# Altium PCB MDBU004A.PcbDoc (part 1 of 2)
Units mil, origin at the board's own origin, x right, y up, seen from the top; angles counter-clockwise.
Board outline 2000 x 3000 mil, 2 copper layers (Top Layer, Bottom Layer), stack 63.4 mil thick; 60 components, 60 nets, 274 pads, 201 vias.
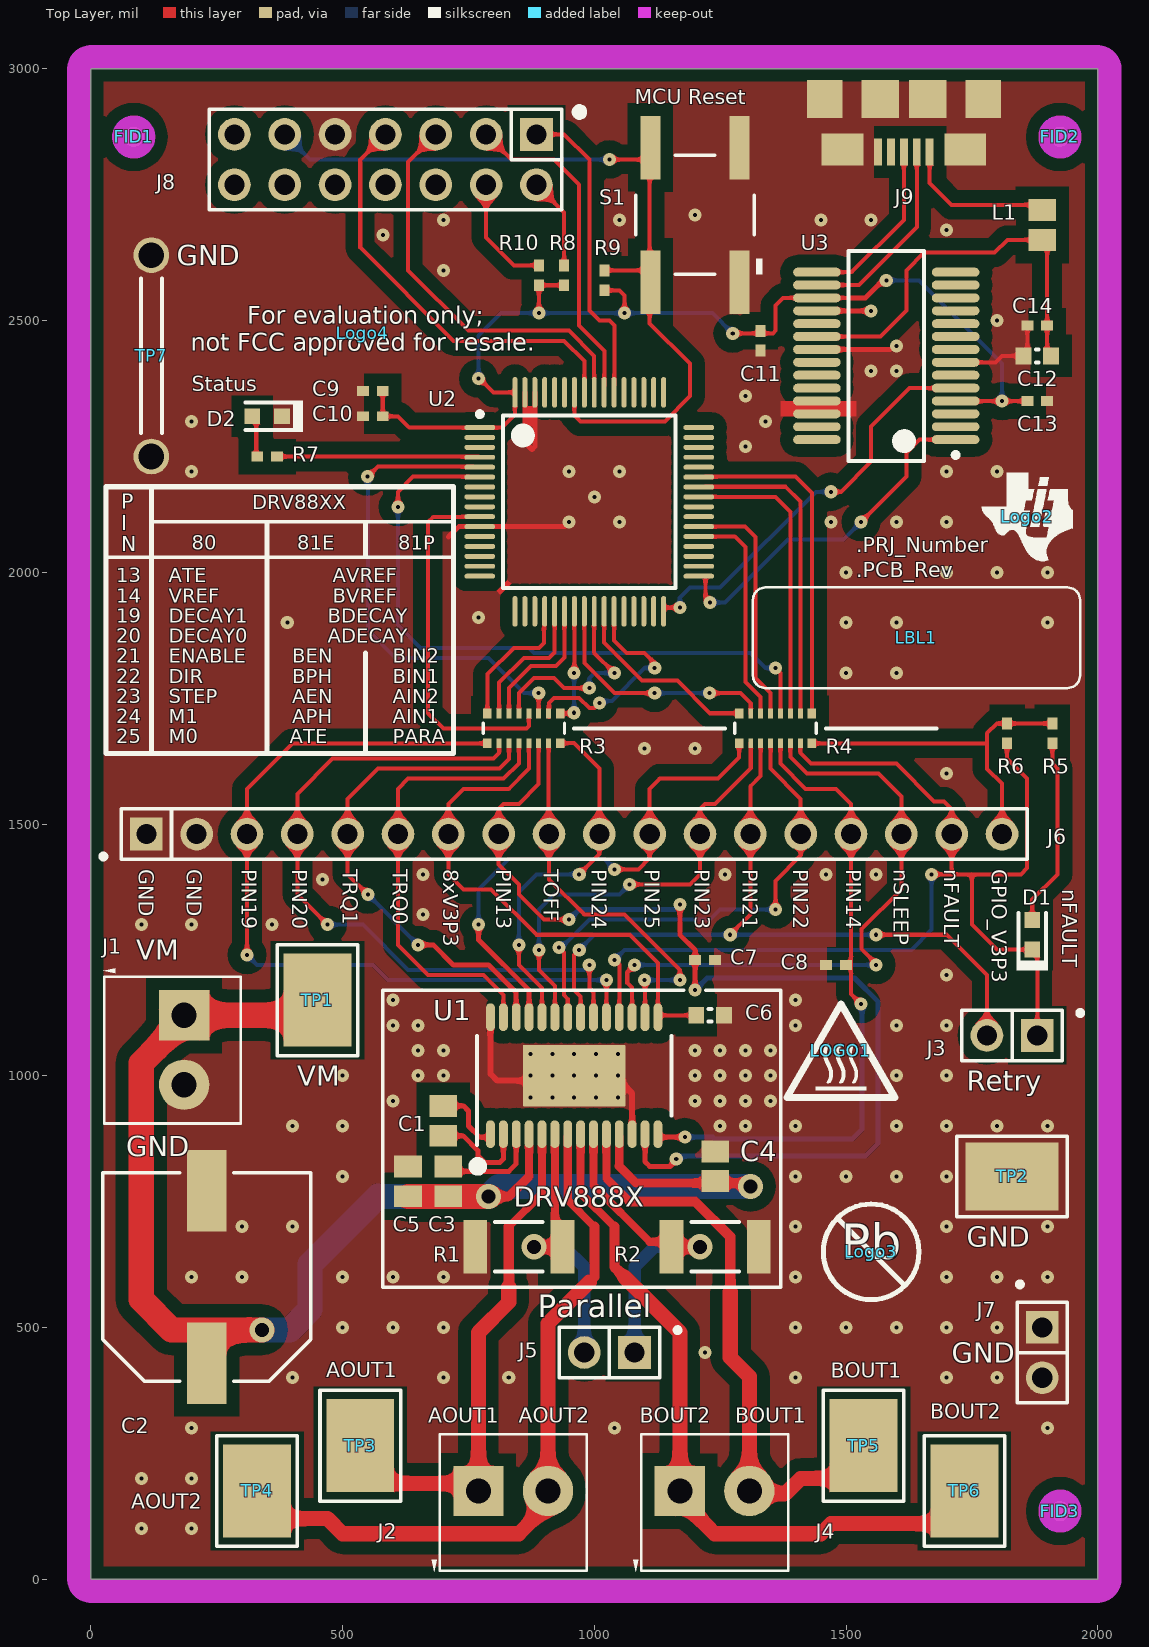
[diagram p0: Top Layer view]
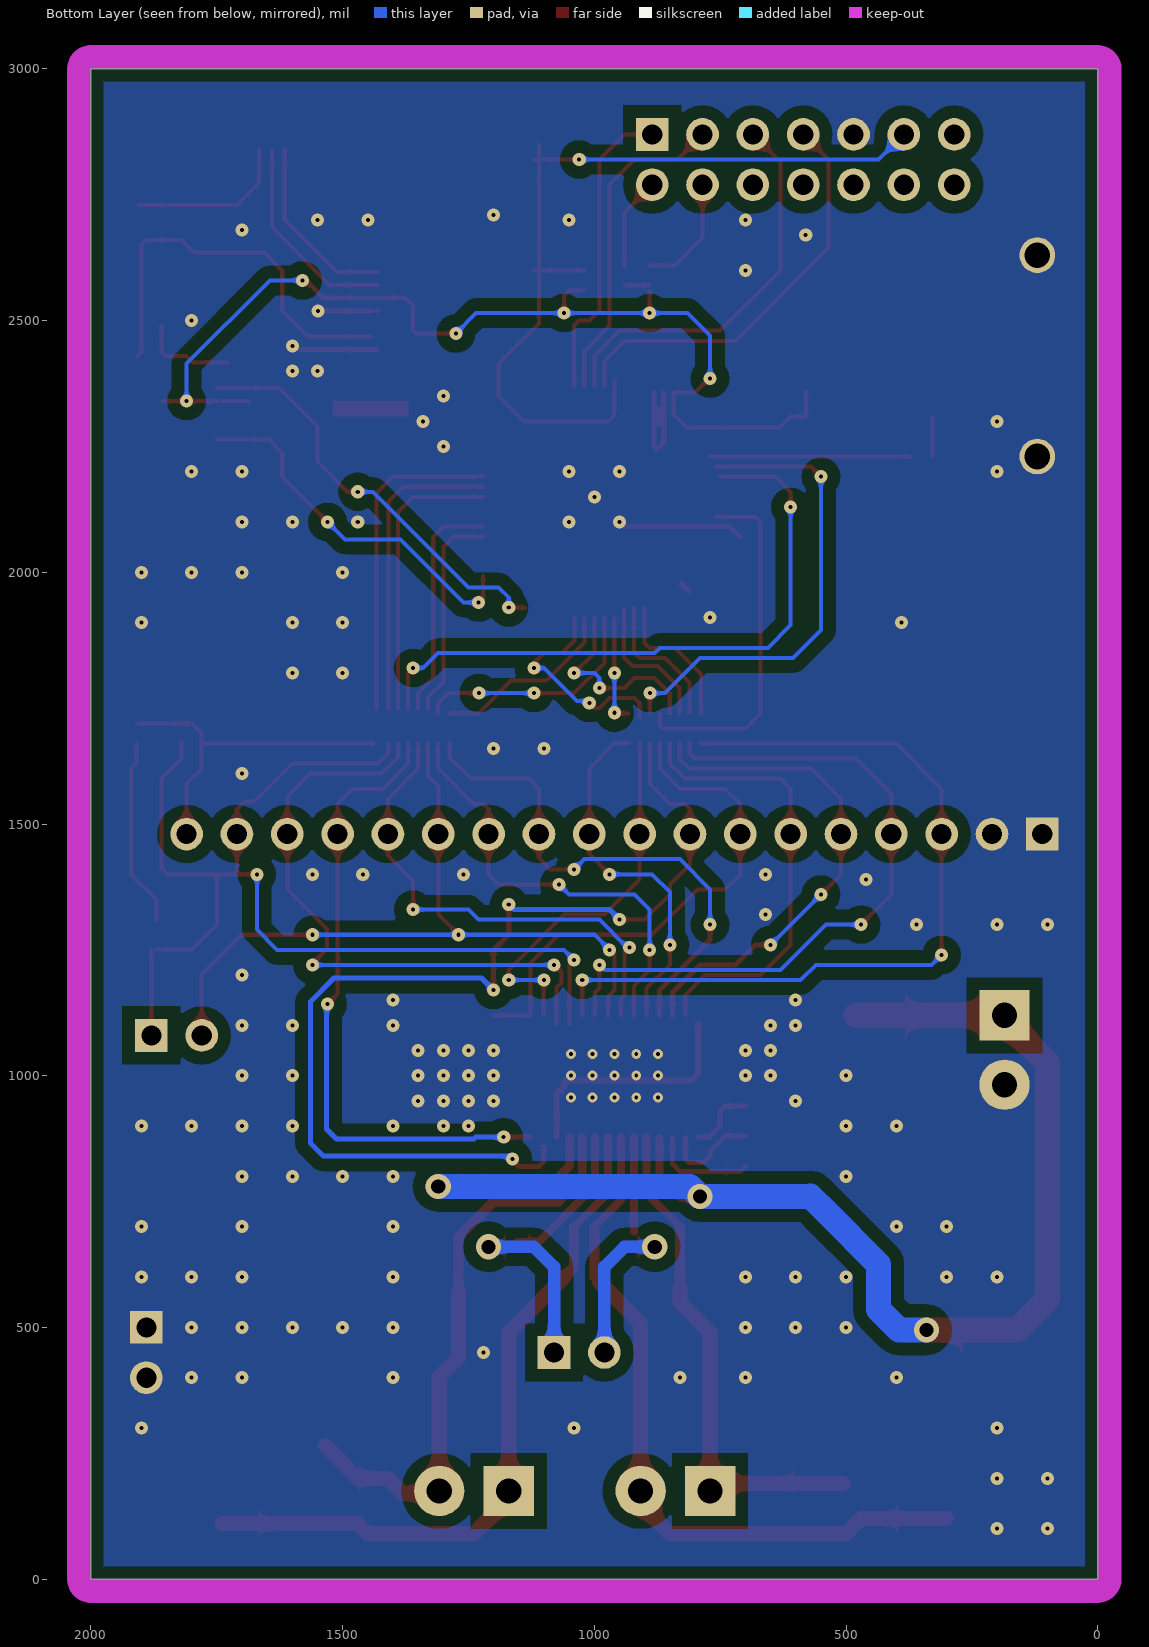
[diagram p1: Bottom Layer view, seen from below]

## Layer stack, top to bottom
Top Solder: solder mask 0.4, Solder Resist, Dk 3.5
Top Layer: signal copper 2.1
Dielectric1: core 59.2, FR-4, Dk 4.8
Bottom Layer: signal copper 2.1
Bottom Solder: solder mask 0.4, Solder Resist, Dk 3.5

## Board outline
0,0 0,3000 2000,3000 2000,0

## Design rules (kind name [scope] priority, off if disabled: settings)
AcuteAngle [All] p1: minimum=4.50000000000000E+0001 checktracksonly=FALSE
AssemblyTestPointUsage [All] p1: valid=2
Clearance Clearance_Keepouts [((IsTrack Or IsArc) And Not InPoly) And IsFree and IsKeepOut vs ((IsTrack Or IsArc) And Not InPoly) And IsFree and IsKeepOut] p1: gap=0
Clearance Clearance_BoardEdge_MountingHoles [OnCopper and InComponentClass('Mounting Holes') vs IsKeepOut] p2: gap=40
Clearance Clearance_BoardEdge_Poly [OnCopper and InPoly vs IsKeepOut] p3: gap=25
Clearance Clearance_BoardEdge [OnCopper and Not InComponentClass('Logo') and not InComponentClass('FiducialMark') and not InRegion(1000,500,4000,800) and Not IsKeepout vs IsKeepOut] p4: gap=20
Clearance Clearance_Poly [InPolygon] p5: gap=25
Clearance [All] p6: gap=7.87
ComponentClearance ComponentClearance_MountingHoles_FiducialMarks [InComponentClass('Mounting Holes') vs InComponentClass('FiducialMark')] p1: gap=50 collisioncheckmode=3 verticalgap=10 showdistances=FALSE
ComponentClearance ComponentClearance_Shunt [InComponentClass('Header') vs InComponentClass('Shunt')] p2: gap=0 collisioncheckmode=3 verticalgap=0 showdistances=FALSE
ComponentClearance ComponentClearance_Logo [InComponentClass('Logo')] p3: gap=50 collisioncheckmode=3 verticalgap=10 showdistances=FALSE
ComponentClearance ComponentClearance_ScrewToNut [(HasFootprint('NY PMS 440 0025 PH')) vs (HasFootprint('Keystone_1902C'))] p4: gap=5 collisioncheckmode=3 verticalgap=10 showdistances=FALSE
ComponentClearance ComponentClearance_MountingHoles [InComponentClass('Mounting Holes')] p5: gap=250 collisioncheckmode=3 verticalgap=100000 showdistances=FALSE
ComponentClearance ComponentClearance_SmallPassives [HasFootprint('0201*') or HasFootprint('0402*') or HasFootprint('0508') or HasFootprint('0603*') or HasFootprint('0612') or HasFootprint('0805*') or HasFootprint('0815*') or HasFootprint('0830*') or HasFootprint('1206*') or HasFootprint('1210*') or HasFootprint('1808*') or HasFootprint('1812*') or HasFootprint('1825*') or HasFootprint('2010*') or HasFootprint('2220*') or HasFootprint('2225*') or HasFootprint('2512*') or HasFootprint('2728*') or HasFootprint('3518*') vs HasFootprint('0201*') or HasFootprint('0402*') or HasFootprint('0508') or HasFootprint('0603*') or HasFootprint('0612') or HasFootprint('0805*') or HasFootprint('0815*') or HasFootprint('0830*') or HasFootprint('1206*') or HasFootprint('1210*') or HasFootprint('1808*') or HasFootprint('1812*') or HasFootprint('1825*') or HasFootprint('2010*') or HasFootprint('2220*') or HasFootprint('2225*') or HasFootprint('2512*') or HasFootprint('2728*') or HasFootprint('3518*')] p6: gap=20 collisioncheckmode=3 verticalgap=10 showdistances=FALSE
ComponentClearance ComponentClearance_THtoSMT [IsThruComponent vs IsSMTComponent] p7: gap=100 collisioncheckmode=3 verticalgap=30 showdistances=FALSE
ComponentClearance ComponentClearance_THtoTH [IsThruComponent vs IsThruComponent] p8: gap=118.11 collisioncheckmode=3 verticalgap=30 showdistances=FALSE
ComponentClearance [All] p9: gap=40 collisioncheckmode=3 verticalgap=10 showdistances=FALSE
DiffPairsRouting [All] p1: maxlimit=100 minlimit=10 mostfreqgap=10 toplayer_minwidth=15 toplayer_maxwidth=15 toplayer_prefwidth=15 bottomlayer_minwidth=15 bottomlayer_maxwidth=15 bottomlayer_prefwidth=15 maxuncoupledlength=1000
FabricationTestPointUsage TestPointUsage [All] p1: valid=2 allowmultiple=FALSE
FabricationTestpoint Testpoint [All] p1: side=3 testpointundercomponent=TRUE minsize=40 maxsize=100 preferedsize=60 minholesize=0 maxholesize=40 preferedholesize=32 testpointgrid=1 allowsidetop=TRUE allowsidebottom=TRUE usegrid=TRUE gridtolerance=0.01
FanoutControl Fanout_LCC [IsLCC] p1: bgadir=Out bgaviamode=Centered fanoutstyle=Auto fanoutdirection=Alternating viagrid=1 // Fanout_LCC (Default Rule)
FanoutControl Fanout_BGA [IsBGA] p2: bgadir=Out bgaviamode=Centered fanoutstyle=Auto fanoutdirection=Alternating viagrid=1 // Fanout_BGA (Default Rule)
FanoutControl Fanout_Default [All] p4: bgadir=Out bgaviamode=Centered fanoutstyle=Auto fanoutdirection=Alternating viagrid=1 // Fanout_Default (Default Rule)
FanoutControl Fanout_Small [(CompPinCount < 5)] p5: bgadir=Out bgaviamode=Centered fanoutstyle=Auto fanoutdirection=OutThenIn viagrid=1 // Fanout_Small (Default Rule)
HoleSize [All] p1: absolutevalues=TRUE maxlimit=251 minlimit=7.87 maxpercent=80.000 minpercent=20.000
MinimumAnnularRing MinimumAnnularRing_ThermalPadVias [IsVia and InAnyComponent] p1: minimumring=3.94
MinimumAnnularRing [All] p2: minimumring=5
MinimumSolderMaskSliver MinimumSolderMaskSliver_Logo [InComponentClass('Logo') vs InComponentClass('Logo')] p1: minsoldermaskwidth=0.7
MinimumSolderMaskSliver [All] p2: minsoldermaskwidth=3.94
PlaneConnect [All] p1: planeconnectstyle=Relief reliefexpansion=10 reliefentries=4 reliefconductorwidth=10 reliefairgap=10
PolygonConnect PolygonConnect_2 [All vs IsNamedPolygon('Top Layer-GND')] p1: connectstyle=Direct reliefconductorwidth=10 reliefentries=4 polygonreliefangle="90 Angle" airgapwidth=10
PolygonConnect PolygonConnect_1 [All vs IsNamedPolygon('Bottom Layer-GND')] p2: connectstyle=Direct reliefconductorwidth=10 reliefentries=4 polygonreliefangle="90 Angle" airgapwidth=10
PolygonConnect [All] p3: connectstyle=Relief reliefconductorwidth=10 reliefentries=4 polygonreliefangle="90 Angle" airgapwidth=10
RoutingVias ThermalPadVias [IsVia and InAnyComponent] p1: holewidth=7.87 width=19.68 viastyle="Through Hole" minholewidth=7.87 minwidth=15.75 maxholewidth=12.99 maxwidth=23.62
RoutingVias [All] p2: holewidth=16 width=34 viastyle="Through Hole" minholewidth=7.87 minwidth=26 maxholewidth=40 maxwidth=65
SilkToBoardRegionClearance [Not ((IsComment or IsDesignator) And (Hide <> 'False')) and not InRegion(1000,500,4000,800)] p1 off:
SilkToSilkClearance SilkToSilkClearance_Pb-FreeLogo [(HasFootprint('Pb-Free_Overlay_Medium') OR HasFootprint('Pb-Free_Overlay_Small')) vs (HasFootprint('Pb-Free_Overlay_Medium') OR HasFootprint('Pb-Free_Overlay_Small'))] p1: silktosilkclearance=0
SilkToSilkClearance [All] p2: silktosilkclearance=3
SilkToSolderMaskClearance "Silk to Solder Mask Opening" [All] p1: minsilkscreentomaskgap=3 clearancetoexposedcopper=FALSE
SolderMaskExpansion [All] p1: expansion=1.97
UnpouredPolygon [All] p1: allowunpoured=FALSE
Width [All] p1: maxlimit=100 minlimit=6 preferedwidth=10 checkconnectedcopper=TRUE
14 further rules are at their usual default settings.

## Classes and differential pairs
component class Header: J3 J5 J6 J7 J8
component class MDBU004A_DRV888x: C1 C2 C3 C4 C5 C6 C7 C8 D1 J1 J2 J3 J4 J5 J6 J7 R1 R2 R3 R4 R5 R6 TP1 TP2 TP3 TP4 TP5 TP6 TP7 U1
component class MDBU004A_DRV888x_MSP430F2617: C9 C10 C11 C12 C13 C14 D2 J8 J9 L1 R7 R8 R9 R10 S1 U2 U3
component class Logo: Logo2
component class MDBU004A_Hardware: FID1 FID2 FID3 LBL1 LOGO1 Logo2 Logo3 Logo4 ZZ1 ZZ2 ZZ3 ZZ4 ZZ5
component class FiducialMark: FID1 FID2 FID3
component class AssemblyNote: ZZ1 ZZ2 ZZ3 ZZ4 ZZ5
component class Label: LBL1

## Components (designator, comment, footprint, x,y, rotation, side; value= is the part's Value field where it differs from the comment)
C1 "C0805C104K1RACTU" 0805L 700,910 r270 top
C2 "EEE-FK1J101P" SM_RADIAL_G 230,600 r90 top
C3 "C2012X7R1E474K" 0805L 710,790 r270 top
C4 "C0805C104K1RACTU" 0805L 1240,820 r270 top
C5 "C0805C104K1RACTU" 0805L 630,790 r270 top
C6 "C0603C474K9RACTU" 0603L 1230,1120 r0 top
C7 "GRM155R61A104KA01D" 0402L 1220,1230 r0 top
C8 "GRM155R61A104KA01D" 0402L 1480,1220 r180 top
C9 "GRM155R61A104KA01D" 0402L 560,2360 r180 top
C10 "GRM155R61A104KA01D" 0402L 560,2310 r180 top
C11 "GRM155R61A104KA01D" 0402L 1330,2460 r270 top
C12 "CGB3B1X5R1A475K055AC" 0603L 1880,2430 r180 top
C13 "GRM155R61A105KE15D" 0402L 1880,2340 r0 top
C14 "GRM155R61A104KA01D" 0402L 1880,2490 r180 top
D1 "LTST-C190CKT" LED_LTST-C190_Red 1870,1280 r270 top
D2 "LTST-C190GKT" LED_LTST-C190 350,2310 r0 top
FID1 "Fiducial" Fiducial10-20 85,2865 r90 top
FID2 "Fiducial" Fiducial10-20 1925,2865 r90 top
FID3 "Fiducial" Fiducial10-20 1925,135 r90 top
J1 "ED555/2DS" TERM_BLK_ED555-2DS 185,1120 r270 top
J2 "ED555/2DS" TERM_BLK_ED555-2DS 770,175 r0 top
J3 "90120-0122" CONN_90120-0122 1830,1080 r180 top
J4 "ED555/2DS" TERM_BLK_ED555-2DS 1170,175 r0 top
J5 "90120-0122" CONN_90120-0122 1030,450 r180 top
J6 "TSW-118-07-G-S" TSW-118-07-G-S 960,1480 r0 top
J7 "90120-0122" CONN_90120-0122 1890,450 r270 top
J8 "PEC07DAAN" CONN_PEC07DAAN 585,2820 r180 top
J9 "ZX62-B-5PA(11)" CONN_USB_micro_ZX62-B-5PA 1615,2835 r180 top
L1 "MMZ2012R300A" 0805L 1890,2690 r90 top
LBL1 "Size: 0.65\" x 0.20 \"" Label_650x200 1640,1870 r0 top
LOGO1 "CAUTION HOT SURFACE" IEC_HotSurface_Small 1490,1050 r0 top
Logo2 "Texas Instruments" TI_Symbol_Overlay_Small 1860,2110 r0 top
Logo3 "Pb-Free Symbol" Pb-Free_Overlay_Medium 1550,650 r0 top
Logo4 "FCC disclaimer" FCC_disclaimer_stacked 540,2475 r0 top
R1 "CSRN2010FKR250" 2010L 850,660 r0 top
R2 "CSRN2010FKR250" 2010L 1240,660 r180 top
R3 "EXB-2HV330JV" RESCAXS_EXB-2HV 860,1690 r0 top
R4 "EXB-2HV330JV" RESCAXS_EXB-2HV 1360,1690 r0 top
R5 "CRCW0402510RJNED" 0402L 1910,1680 r90 top
R6 "CRCW04024K99FKED" 0402L 1820,1680 r90 top
R7 "CRCW0402330RJNED" 0402L 350,2230 r0 top
R8 "ERJ-2GE0R00X" 0402L 940,2590 r90 top
R9 "CRCW04023K32FKED" 0402L 1020,2580 r270 top
R10 "ERJ-2GE0R00X" 0402L 890,2590 r90 top
S1 "EVQP1D05M" SW_EVQxxx05M 1200,2710 r180 top
TP1 "5016" Testpoint_Keystone_Compact 450,1150 r90 top
TP2 "5016" Testpoint_Keystone_Compact 1830,800 r180 top
TP3 "5016" Testpoint_Keystone_Compact 535,265 r90 top
TP4 "5016" Testpoint_Keystone_Compact 330,175 r90 top
TP5 "5016" Testpoint_Keystone_Compact 1535,265 r90 top
TP6 "5016" Testpoint_Keystone_Compact 1735,175 r90 top
TP7 "D3082-05" Harwin_D3082-05 120,2430 r270 top
U1 "DRV8880PWPR" PWP0028C_N 960,1000 r90 top
U2 "MSP430F2617TPM" PM0064A_L 990,2140 r0 top
U3 "FT232RL" SSOP28_M 1580,2430 r180 top
ZZ1 "This Assembly Note is for PCB labels only" AssemblyNoteLabel 276,3252 r0 top
ZZ2 "These assemblies are ESD sensitive, ESD precautions shall be observed." AssemblyNote 276,3412 r0 top
ZZ3 "These assemblies must be clean and free from flux and all contaminants. Use of no clean flux is not acceptable." AssemblyNote 276,3592 r0 top
ZZ4 "These assemblies must comply with workmanship standards IPC-A-610 Class 2, unless otherwise specified." AssemblyNote 276,3772 r0 top
ZZ5 "Shorting plug TP7 shall be raised to minimum height of 250mils above PCB" AssemblyNote 276,3952 r0 top

## Footprints (in the part's own frame and the unit in brackets; to place one, negate y for a bottom-side part, rotate by r counter-clockwise, add the part's x,y. Pads: shape width x height; smd on the part's side, far side on the other; paste and mask are expansions set on the pad)
0402L [mm] "0402 from SM-752 data"
  rect 0.6x0.5 smd: 1(-0.5,0) 2(0.5,0)
  body extent -0.55,-0.3 0.55,0.3, height 0.6
0603L [mm] "0603 from SM-752 data"
  rect 0.8x0.85 smd: 1(-0.7,0) 2(0.7,0)
  silkscreen extent -0.07,-0.33 0.07,0.33, body extent -0.87,-0.47 0.87,0.47, height 0.85
0805L [mm] "0805 from SM-752 data"
  rect 1.1x1.4 smd: 1(-0.75,0) 2(0.75,0)
  body extent -1.1,-0.72 1.1,0.72, height 1.1
2010L [mm]
  rect 1.2x2.7 smd: 1(-2.2,0) 2(2.2,0)
  silkscreen extent -1.2,-1.25 1.2,1.25, body extent -2.73,-1.45 2.73,1.45, height 1.66
AssemblyNote [mil] "Assembly Note"
AssemblyNoteLabel [mil] "Assembly Note for PCB Labels"
CONN_90120-0122 [mm] "Molex"
  rect 1.65x1.65 hole 1.016 mask+0: 1(-1.27,0)
  round 1.65 hole 1.016 mask+0: 2(1.27,0)
  silkscreen extent -3.57,-1.27 2.54,1.27, body extent -2.54,-1.27 2.54,1.27, height 9.29
CONN_PEC07DAAN [mm] "SULLINS"
  rect 1.65x1.65 hole 1.016 mask+0: 1(-7.62,-1.27)
  round 1.65 hole 1.016 mask+0: 2(-7.62,1.27) 3(-5.08,-1.27) 4(-5.08,1.27) 5(-2.54,-1.27) 6(-2.54,1.27) 7(0,-1.27) 8(0,1.27) 9(2.54,-1.27) 10(2.54,1.27) 11(5.08,-1.27) 12(5.08,1.27) 13(7.62,-1.27) 14(7.62,1.27)
  silkscreen extent -9.99,-2.6 8.89,2.54, body extent -8.95,-2.6 8.95,2.6, height 11.43
CONN_USB_micro_ZX62-B-5PA [mm] "Hirose"
  rect 0.4x1.35 smd: 1(-1.3,0) 2(-0.65,0) 3(0,0) 4(0.65,0) 5(1.3,0)
  rect 1.9x1.9 smd: 6(-1.2,-2.675) 7(1.2,-2.675)
  rect 1.8x1.9 smd: 8(-4,-2.675) 9(4,-2.675)
  rect 2.1x1.6 smd: 10(-3.1,-0.125) 11(3.1,-0.125)
  body extent -3.75,-5.33 3.75,0.18, height 2.55
FCC_disclaimer_stacked [mil]
Fiducial10-20 [mm]
  round 1 smd mask+0.5: 1(0,0)
  Top Layer keep-out circle w1.178: c0,0 r0.5
Harwin_D3082-05 [mm] "Shorting Plug, 10.16mm spacing, TH"
  round 1.8 hole 1.3: 1(-5.08,0) 2(5.08,0)
  silkscreen extent -3.9,-0.53 3.9,0.53, body extent -5.6,-0.52 5.61,0.52, height 6.63
IEC_HotSurface_Small [mil]
  silkscreen extent -107,-93 107,92
Label_650x200 [mil] "Thermal Transfer Label"
  round 1 on Mech13: 0(0,0)
  silkscreen extent -325,-100 325,100, body extent -326,-101 326,101, height 1
LED_LTST-C190 [mm] "Lite-On"
  rect 0.8x0.8 smd: 1(-0.75,0) 2(0.75,0)
  silkscreen extent -1.1,-0.8 1.8,0.8, body extent -0.85,-0.45 0.85,0.45, height 0.9
LED_LTST-C190_Red [mm] "Lite-On"
  rect 0.8x0.8 smd: 1(-0.75,0) 2(0.75,0)
  silkscreen extent -1.1,-0.8 1.8,0.8, body extent -0.85,-0.45 0.85,0.45, height 0.9
Pb-Free_Overlay_Medium [mil]
  silkscreen extent -95,-95 95,95
PM0064A_L [mm] "Thin QFP, 64-Leads, Body 10x10mm, Pitch 0.5mm, IPC High Density"
  oval 1.55x0.25 smd: 1(-5.525,3.75) 2(-5.525,3.25) 3(-5.525,2.75) 4(-5.525,2.25) 5(-5.525,1.75) 6(-5.525,1.25) 7(-5.525,0.75) 8(-5.525,0.25) 9(-5.525,-0.25) 10(-5.525,-0.75) 11(-5.525,-1.25) 12(-5.525,-1.75) 13(-5.525,-2.25) 14(-5.525,-2.75) 15(-5.525,-3.25) 16(-5.525,-3.75) 33(5.525,-3.75) 34(5.525,-3.25) 35(5.525,-2.75) 36(5.525,-2.25) 37(5.525,-1.75) 38(5.525,-1.25) 39(5.525,-0.75) 40(5.525,-0.25) 41(5.525,0.25) 42(5.525,0.75) 43(5.525,1.25) 44(5.525,1.75) 45(5.525,2.25) 46(5.525,2.75) 47(5.525,3.25) 48(5.525,3.75)
  oval 0.25x1.55 smd: 17(-3.75,-5.525) 18(-3.25,-5.525) 19(-2.75,-5.525) 20(-2.25,-5.525) 21(-1.75,-5.525) 22(-1.25,-5.525) 23(-0.75,-5.525) 24(-0.25,-5.525) 25(0.25,-5.525) 26(0.75,-5.525) 27(1.25,-5.525) 28(1.75,-5.525) 29(2.25,-5.525) 30(2.75,-5.525) 31(3.25,-5.525) 32(3.75,-5.525) 49(3.75,5.525) 50(3.25,5.525) 51(2.75,5.525) 52(2.25,5.525) 53(1.75,5.525) 54(1.25,5.525) 55(0.75,5.525) 56(0.25,5.525) 57(-0.25,5.525) 58(-0.75,5.525) 59(-1.25,5.525) 60(-1.75,5.525) 61(-2.25,5.525) 62(-2.75,5.525) 63(-3.25,5.525) 64(-3.75,5.525)
  silkscreen extent -5.65,-4.35 4.35,4.55, body extent -5,-5 5,5, height 1.61
PWP0028C_N [mm] "TSOP, 28-Leads, Body 9.7x4.4mm, Pitch 0.65mm, Exposed Pad, IPC Medium Density"
  rrect100% 1.4x0.45 smd: 1(-2.95,4.225) 2(-2.95,3.575) 3(-2.95,2.925) 4(-2.95,2.275) 5(-2.95,1.625) 6(-2.95,0.975) 7(-2.95,0.325) 8(-2.95,-0.325) 9(-2.95,-0.975) 10(-2.95,-1.625) 11(-2.95,-2.275) 12(-2.95,-2.925) 13(-2.95,-3.575) 14(-2.95,-4.225) 15(2.95,-4.225) 16(2.95,-3.575) 17(2.95,-2.925) 18(2.95,-2.275) 19(2.95,-1.625) 20(2.95,-0.975) 21(2.95,-0.325) 22(2.95,0.325) 23(2.95,0.975) 24(2.95,1.625) 25(2.95,2.275) 26(2.95,2.925) 27(2.95,3.575) 28(2.95,4.225)
  rrect3% 3.1x5.18 smd: 29(0,0)
  silkscreen extent -3.5,-4.9 2,4.9, body extent -3.21,-4.85 3.21,4.85, height 0.98
RESCAXS_EXB-2HV [mm] "Panasonic Resistor Array"
  rect 0.425x0.5 smd mask+0.07: 1(-1.837,-0.75) 8(1.837,-0.75) 9(1.837,0.75) 16(-1.837,0.75)
  rect 0.25x0.5 smd mask+0.07: 2(-1.25,-0.75) 3(-0.75,-0.75) 4(-0.25,-0.75) 5(0.25,-0.75) 6(0.75,-0.75) 7(1.25,-0.75) 10(1.25,0.75) 11(0.75,0.75) 12(0.25,0.75) 13(-0.25,0.75) 14(-0.75,0.75) 15(-1.25,0.75)
  silkscreen extent -2.05,-0.25 2.05,0.25, body extent -1.95,-0.8 1.95,0.8, height 0.55
SM_RADIAL_G [mm] "10 x 10.2mm:  Panasonic G"
  rect 4.1x2 smd: 1(-4.35,0) 2(4.35,0)
  silkscreen extent -5.25,-5.25 5.25,5.25, body extent -5.26,-5.26 5.26,5.26, height 10.5
SSOP28_M [mm] "SOP, 28-Leads, Body 10.2x5.3mm, Pitch 0.65mm, IPC Low Density"
  oval 2.4x0.45 smd: 1(-3.5,4.225) 2(-3.5,3.575) 3(-3.5,2.925) 4(-3.5,2.275) 5(-3.5,1.625) 6(-3.5,0.975) 7(-3.5,0.325) 8(-3.5,-0.325) 9(-3.5,-0.975) 10(-3.5,-1.625) 11(-3.5,-2.275) 12(-3.5,-2.925) 13(-3.5,-3.575) 14(-3.5,-4.225) 15(3.5,-4.225) 16(3.5,-3.575) 17(3.5,-2.925) 18(3.5,-2.275) 19(3.5,-1.625) 20(3.5,-0.975) 21(3.5,-0.325) 22(3.5,0.325) 23(3.5,0.975) 24(3.5,1.625) 25(3.5,2.275) 26(3.5,2.925) 27(3.5,3.575) 28(3.5,4.225)
  silkscreen extent -3.63,-5.3 1.9,5.3, body extent -2.7,-5.3 2.7,5.3, height 2
SW_EVQxxx05M [mm] "Panasonic EVQP0/EVQP1/EVQ9P 6mm Square Long Travel Light Touch Switch"
  rect 1x3.2 smd: 1(-2.25,3.4) 2(-2.25,-3.4) 3(2.25,-3.4) 4(2.25,3.4)
  silkscreen extent -3.4,-3 3,3, body extent -3,-3 3,3, height 5
TERM_BLK_ED555-2DS [mil]
  rect 100x100 hole 50: 1(0,0)
  round 100 hole 50: 2(138,0)
  silkscreen extent -93,-161 215,113, body extent -69,-150 207,106, height 323
Testpoint_Keystone_Compact [mil] "Compact SMT test point"
  rect 185x135 smd: 1(0,0)
  silkscreen extent -110,-80 110,80, body extent -75,-56 75,56, height 91
TI_Symbol_Overlay_Small [mil]
  silkscreen extent -90,-88 91,88
TSW-118-07-G-S [mm] "Samtec 100mil, 1x18, 230 mil above insulator"
  rect 1.65x1.65 hole 1.016 mask+0: 1(-21.59,0)
  round 1.65 hole 1.016 mask+0: 2(-19.05,0) 3(-16.51,0) 4(-13.97,0) 5(-11.43,0) 6(-8.89,0) 7(-6.35,0) 8(-3.81,0) 9(-1.27,0) 10(1.27,0) 11(3.81,0) 12(6.35,0) 13(8.89,0) 14(11.43,0) 15(13.97,0) 16(16.51,0) 17(19.05,0) 18(21.59,0)
  silkscreen extent -23.88,-1.27 22.86,1.27, body extent -22.86,-1.27 22.86,1.27, height 8.38

## Part data
C1 C4 C5: "CAP, CERM, 0.1 µF, 100 V, +/- 10%, X7R, 0805"
C2: "CAP, AL, 100 µF, 63 V, +/- 20%, 0.35 ohm, SMD"
C3: "CAP, CERM, 0.47 µF, 25 V, +/- 10%, X7R, 0805"
C6: "CAP, CERM, 0.47 µF, 6.3 V, +/- 10%, X7R, 0603"
C7 C8 C9 C10 C11 C14: "CAP, CERM, 0.1 µF, 10 V, +/- 10%, X5R, 0402"
C12: "CAP, CERM, 4.7 µF, 10 V, +/- 10%, X5R, 0603"
C13: "CAP, CERM, 1 µF, 10 V, +/- 10%, X5R, 0402"
D1: "LED, Red, SMD"
D2: "LED, Green, SMD"
FID1 FID2 FID3: "Fiducial mark.  There is nothing to buy or mount."
J1 J2 J4: "Terminal Block, 6A, 3.5mm Pitch, 2-Pos, TH"
J3 J5 J7: "Header, 100mil, 2x1, Tin, TH"
J6: "Header, 100mil, 18x1, Gold, TH"
J8: "Header, 100mil, 7x2, Tin, TH"
J9: "Connector, Receptacle, Micro-USB Type B, R/A, Bottom Mount SMT"
L1: "Ferrite Bead, 30 ohm @ 100 MHz, 1.5 A, 0805"
LBL1: library part THT-14-423-10, "Thermal Transfer Printable Labels, 0.650\" W x 0.200\" H - 10,000 per roll"
LOGO1: library part IEC_HotSurface, "IEC 61010-1 Hot Surface Warning"
Logo2: library part TI_Logo, "Texas Instrument Corporate Signature"
Logo3: library part Pb-Free
Logo4: library part FCC_disclaimer, "FCC_disclaimer"
R1 R2: "RES, 0.25, 1%, 1 W, 2010"
R3 R4: "RES, 33, 5%, 0.0625 W, Resistor Array - 8x1"
R5: "RES, 510, 5%, 0.063 W, 0402"
R6: "RES, 4.99 k, 1%, 0.063 W, 0402"
R7: "RES, 330, 5%, 0.063 W, 0402"
R8 R10: "RES, 0, 5%, 0.063 W, 0402"
R9: "RES, 3.32 k, 1%, 0.063 W, 0402"
S1: "Switch, Tactile, SPST-NO, 0.05A, 12V, SMT"
TP1 TP2 TP3 TP4 TP5 TP6: "Test Point, Compact, SMT"
TP7: "1mm Uninsulated Shorting Plug, 10.16mm spacing, TH"
U1: "2-A 45-V 1/16-µstep Stepper Motor Driver With AutoTune, PWP0028C"
U2: "16 MHz Mixed Signal Microcontroller with 92 KB Flash, 8192 B SRAM and 48 GPIOs, -40 to 105 degC, 64-pin QFP (PM), Green (RoHS & no Sb/Br)"
U3: "USB to Serial UART, SSOP28"
ZZ1: library part AssemblyNoteLabel
ZZ2 ZZ3 ZZ4 ZZ5: library part AssemblyNote

## Via types
v1: diameter 26, hole 8, Top Layer to Bottom Layer, tented both sides, 180 vias
v2: diameter 19.68, hole 7.87, Top Layer to Bottom Layer, 15 vias
v3: diameter 50, hole 28, Top Layer to Bottom Layer, tented both sides, 5 vias
v4: diameter 26, hole 8, Top Layer to Bottom Layer, tented top, 1 vias

## Nets (pads, with @x,y where several pads share a name; then routed paths per layer and width w, separated by ;. In a path a pad name is that pad's centre, name@x,y a point inside that pad or via, vN(x,y) a via of type N, cw(c..) or ccw(c..) an arc to the next point about the centre after c; other vN are vias at no path point)
8XV3P3: C6.1 J6.7 R3.5 U1.15 | length 1048.5
  Top Layer w8: R3.5@869.84,1660.47 869.84,1609.84 830,1570 740,1570 710,1540 710,1490 710,1400 740,1370 795,1370 885,1280 1070,1280 1126.34,1223.66 1126.34,1120 C6.1@1202.44,1120
AISEN: J5.2 R1.2 U1.6 | length 572.2
  Top Layer w16: R1.2@921.61,690 U1.6@921.61,877.8
  Top Layer w25: v3(880,660) 869.68,660 R1.2@936.61,660
  Bottom Layer w25: v3(880,660) 869.68,660 940,660 980,620 J5.2@980,450
AOUT1: J2.1 TP3.1 U1.5 | length 1001.3
  Top Layer w16: 830,700 896.02,766.02 U1.5@896.02,877.8
  Top Layer w20: 830,580 830,700
  Top Layer w30: TP3.1@503.69,190.08 514.98,190.08 J2.1@750,190 ; J2.1@770,175 770,490 830,550 830,580
AOUT2: J2.2 TP4.1 U1.7 | length 1448.4
  Top Layer w16: U1.7@947.2,877.8 947.2,752.8 1000,700 ; 980,580 1000,600
  Top Layer w20: 1000,600 1000,700
  Top Layer w30: TP4.1@300,120 470,120 500,90 850,90 908,148 J2.2@908,175 908,508 980,580 990,590
BISEN: J5.1 R2.2 U1.9 | length 669.4
  Top Layer w16: U1.9@998.39,877.8 998.39,781.61 1110,670 R2.2@1152.2,670
  Top Layer w25: R2.2@1153.39,660 v3(1210,660)
  Bottom Layer w25: J5.1@1080,450 1080,620 1120,660 v3(1210,660)
BOUT1: J4.2 TP5.1 U1.10 | length 1145
  Top Layer w16: U1.10@1023.98,877.8 1023.98,796.02 1070,750
  Top Layer w20: 1070,750 1200,750 1270,680 1270,570
  Top Layer w30: 1270,570 1270,440 1308,402 J4.2@1308,175 ; J4.2@1328,175 1333,170 1380,170 1410,200 1470,200 TP5.1@1535,265
BOUT2: J4.1 TP6.1 U1.8 | length 1407.4
  Top Layer w16: U1.8@972.8,877.8 972.8,767.2 1040,700
  Top Layer w20: 1040,700 1040,620 1060,600
  Top Layer w30: 1060,600 1170,490 J4.1@1170,175 1170,158.9 1238.9,90 1450,90 1470,110 TP6.1@1740,110
DM: J9.2 U3.16 | length 411.6
  Top Layer w8: U3.16@1430.9,2570.8 1525.8,2570.8 1640.59,2685.59 J9.2@1640.59,2840
DP: J9.3 U3.15 | length 367
  Top Layer w8: U3.15@1430.9,2596.4 1511.4,2596.4 1615,2700 J9.3@1615,2840
GND: C2.2 C4.1 C5.1 C6.2 C7.2 C8.2 C9.2 C10.2 C11.2 C12.2 C13.2 C14.2 D2.2 J1.2 J6.1 J6.2 J7.1 J7.2 J8.9 J9.5 J9.6 J9.7 J9.8 J9.9 J9.10 J9.11 R1.1 R2.1 S1.1 S1.2 TP2.1 TP7.1 TP7.2 U1.12 U1.28 U1.29 U2.11 U2.62 U2.63 U3.7 U3.18 U3.21 U3.25 U3.26 | length 1423.6
  Top Layer w8: U3.7@1728.9,2417.2 1797.2,2417.2 1810,2430 C12.2@1852.44,2430 1860.31,2437.87 C14.2@1860.31,2490
  Top Layer w10: 710,2070 730.79,2090.79 U2.11@772.48,2090.79 ; U2.11@772.39,2090.7 940.7,2090.7 v1(950,2100) ; U2.63@862.05,2357.52 862.05,2257.95 876.02,2243.98 881.73,2249.69 U2.62@881.73,2357.52 ; U3.21@1430.9,2442.8 1587.2,2442.8 ; U3.18@1430.9,2519.33 U3.18@1430.9,2519.6 ; U3.18@1442.2,2519.57 1442.2,2519.33 v1(1549.33,2519.33)
  Top Layer w12: U1.28@793.66,1102.2 793.66,1003.66 807.32,990 U1.29@1058.14,990 ; U1.29@1058.14,981.86 1075.16,964.84 U1.12@1075.16,877.8
  other v1: 100,100 200,100 100,200 200,200 200,300 1040,300 1900,300 400,400 700,400 830,400 1400,400 1700,400 1800,400 1220,450 500,500 600,500 700,500 1400,500 1500,500 1600,500 1700,500 1800,500 200,600 300,600 500,600 600,600 700,600 1400,600 1700,600 1800,600 1900,600 300,700 400,700 1400,700 1700,700 1900,700 500,800 1400,800 1500,800 1600,800 1700,800 400,900 500,900 1250,900 1300,900 1400,900 1600,900 1700,900 1800,900 1900,900 600,950 1200,950 1250,950 1300,950 1350,950 500,1000 650,1000 700,1000 1200,1000 1250,1000 1300,1000 1350,1000 1600,1000 1700,1000 650,1050 700,1050 1200,1050 1250,1050 1300,1050 1350,1050 600,1100 650,1100 1400,1100 1600,1100 1700,1100 600,1150 1400,1150 1700,1200 100,1300 200,1300 360,1300 660,1320 460,1390 660,1400 1260,1400 1460,1400 1560,1400 1700,1600 1100,1650 1200,1650 1500,1800 1600,1800 390,1900 1500,1900 1600,1900 1900,1900 770,1910 1500,2000 1700,2000 1800,2000 1900,2000 1050,2100 1470,2100 1600,2100 1700,2100 1000,2150 200,2200 950,2200 1050,2200 1700,2200 1800,2200 1300,2250 200,2300 1340,2300 1300,2350 1550,2400 1600,2400 1600,2450 1800,2500 700,2600 580,2670 1700,2680 700,2700 1050,2700 1450,2700 1550,2700 1200,2710
  other v2: 873.39,956.69 916.69,956.69 960,956.69 1003.31,956.69 1046.61,956.69 873.39,1000 916.69,1000 960,1000 1003.31,1000 1046.61,1000 873.39,1043.31 916.69,1043.31 960,1043.31 1003.31,1043.31 1046.61,1043.31
GPIO_V3P3: J6.18 R4.8 R5.2 R6.2 | length 681.8
  Top Layer w8: R4.8@1438.5,1660 1780,1660 ; J6.18@1810,1490 1810,1580 1780.31,1609.69 1780.31,1670 1780.31,1680.31 1799.69,1699.69 R6.2@1820,1699.69 R5.2@1910,1699.69
MSP_8XV3P3: R3.12 U2.10 | length 712
  Top Layer w8: U2.10@758.9,2110 680,2110 670,2100 670,1720 700,1690 865,1690 869.84,1694.84 R3.12@869.84,1719.53
MSP_ADEC_AVREF: R3.11 U2.5 | length 954.4
  Top Layer w8: v1@550,2190 570,2210 U2.5@758.9,2210 ; R3.11@889.53,1719.53 v1(889.53,1760)
  Bottom Layer w8: v1@550,2190 550,1885 605,1830 790,1830 860,1760 v1@890,1760
  other v1: 549.53,2190
MSP_DECAY0_ADECAY: R3.15 U2.21 | length 282.4
  Top Layer w8: R3.15@810.79,1721.5 810.79,1780.79 860,1830 867.55,1830 867.62,1830.07 910,1830.07 920.93,1841 921,1841 921,1909 U2.21@921,1929
MSP_DECAY1_BDECAY: R3.16 U2.20 | length 286.3
  Top Layer w8: R3.16@787.66,1719.53 787.66,1797.66 840,1850 890,1850 900,1860 U2.20@900,1930
MSP_DIR_PHB_BIN1: R4.13 U2.38 | length 460.6
  Top Layer w8: U2.38@1220.9,2090.7 1299.3,2090.7 1320,2070 1320,1790 1350.16,1759.84 1350.16,1729.53
MSP_ENABLE_ENB_BIN2: R4.14 U2.37 | length 420.9
  Top Layer w8: U2.37@1220.9,2071 1279,2071 1300,2050 1300,1782.34 1330.47,1751.87 1330.47,1729.53
MSP_GPIO_V3P3: R4.9 U2.43 | length 653
  Top Layer w8: U2.43@1220.9,2190 1400,2190 1432.34,2157.66 1432.34,1729.53
MSP_NFAULT: R4.10 U2.42 | length 611.7
  Top Layer w8: U2.42@1220.9,2170 1380,2170 1409.21,2140.79 1409.21,1729.53
MSP_NSLEEP: R4.11 U2.41 | length 572.9
  Top Layer w8: U2.41@1220,2150 1360,2150 1390,2120 1390,1729.53
MSP_STEP_ENA_AIN2: R4.15 U2.24 | length 472.9
  Top Layer w8: U2.24@980.1,1909 980.1,1819.9 1040,1760 v1(1120,1760) ; v1(1229,1760) 1290,1760 1310.79,1739.21 R4.15@1310.79,1719.53
  Bottom Layer w8: v1(1120,1760) v1(1229,1760)
MSP_TOFF: R3.10 U2.27 | length 436.6
  Top Layer w8: R3.10@910,1712.5 910,1740 920,1750 970,1750 990,1730 1000,1730 v1(1010,1740) ; U2.27@1039.2,1909 1039.2,1864.8 1064,1840 1100,1840 1120,1820 v1(1120,1810)
  Bottom Layer w8: v1(1010,1740) 1014.8,1744.8 1034.8,1744.8 1100,1810 v1(1120,1810)
MSP_TRQ0: R3.13 U2.25 | length 400.9
  Top Layer w8: R3.13@850.16,1719.53 850.16,1760.16 880,1790 920,1790 940,1770 v1(990,1770) ; U2.25@999.8,1909 999.8,1840.2 v1(1040,1800)
  Bottom Layer w8: v1(990,1770) 990,1790 1000,1800 v1(1040,1800)
MSP_TRQ1: R3.14 U2.22 | length 284.4
  Top Layer w8: R3.14@830.47,1719.53 830.47,1770.47 874.2,1814.2 924.2,1814.2 940.7,1830.7 940.7,1909 U2.22@940.7,1929
MSP_USM0_ADEC_PARA: R4.16 U2.26 | length 374.9
  Top Layer w8: U2.26@1019.5,1909 1019.5,1860.5 1095.13,1784.87 1130.3,1784.87 1165.23,1784.87 1230,1720 R4.16@1287.66,1720
MSP_USM1_PHA_AIN1: R3.9 U2.23 | length 215.4
  Top Layer w8: R3.9@932.34,1719.53 v1@959.53,1719.53 ; v1(960,1800) 960.4,1800.4 U2.23@960.4,1909
  Bottom Layer w8: v1(960,1721) v1(960,1800)
MSP_VREF_BVREF: R4.12 U2.6 | length 1287.2
  Top Layer w8: v1(610,2130) 610,2160 640,2190 U2.6@750,2190 ; v1(1359.92,1810.08) 1369.84,1800.16 1369.84,1729.53
  Bottom Layer w8: v1(610,2130) 610,1895 655,1850 870,1850 880,1840 1310.16,1840 1340.08,1810.08 v1(1359.92,1810.08)
NetC1_1: C1.1 U1.1 | length 137.2
  Top Layer w10: C1.1@700,939.53 700.47,940 740,940 750,930 750,900 772.2,877.8 U1.1@793.66,877.8
NetC1_2: C1.2 U1.2 | length 192.9
  Top Layer w10: C1.2@700,880.47 739.53,880.47 769.05,850.95 769.05,840.95 782.12,827.88 812.65,827.88 819.25,834.49 U1.2@819.25,877.8
NetD1_1: D1.1 R5.1 | length 375.6
  Top Layer w8: D1.1@1870,1309.53 1870,1350 1920,1400 1920,1610 1910,1620 R5.1@1910,1660.32
NetD2_1: D2.1 R7.1 | length 79
  Top Layer w8: R7.1@328.35,2230 D2.1@328.35,2308.99
NetJ8_2: J8.2 R8.2 | length 210.1
  Top Layer w8: J8.2@910,2770 J8.2@885,2770 940,2715 R8.2@940,2607.72
NetJ8_4: J8.4 R10.2 | length 232.5
  Top Layer w8: J8.4@785,2770 785,2665 840,2610 R10.2@889.69,2610
NFAULT: D1.2 J3.1 J6.17 R4.7 R6.1 U1.18 | length 2265.3
  Top Layer w8: v1(1040,1230) 1049.57,1220.43 U1.18@1049.57,1102.2 ; R4.7@1409.21,1660.47 1409.21,1640.79 1430,1620 1600,1620 1675,1545 1695,1545 1710,1530 1710,1490 1710,1400 ; v1(1670,1400) 1710,1400 ; R6.1@1820,1662.28 1819.68,1630.32 1860,1590 1860,1412.2 1847.8,1400 1750,1400 ; D1.2@1870,1250.47 1799.53,1250.47 1750,1300 1750,1400 ; J3.1@1880,1080 D1.2@1880,1250 ; 1710,1400 1750,1400
  Bottom Layer w8: v1(1040,1230) 1060,1250 1630,1250 1670,1290 v1(1670,1400)
NSLEEP: J6.16 R4.6 U1.17 | length 1257.8
  Top Layer w8: U1.17@1075.16,1102.2 1075.16,1174.84 1065.44,1184.56 1065.44,1205.44 v1(1080,1220) ; R4.6@1389.53,1660.47 1389.53,1632.82 1422.34,1600 1565,1600 1610,1555 1610,1490 1610,1370 1531.22,1291.22 1531.22,1251.22 1560,1222.45 v1(1560,1220)
  Bottom Layer w8: v1@1090,1220 v1(1560,1220)